# EAGLE board ab_v11_panel (EAGLE 6.1), part 1 of 2
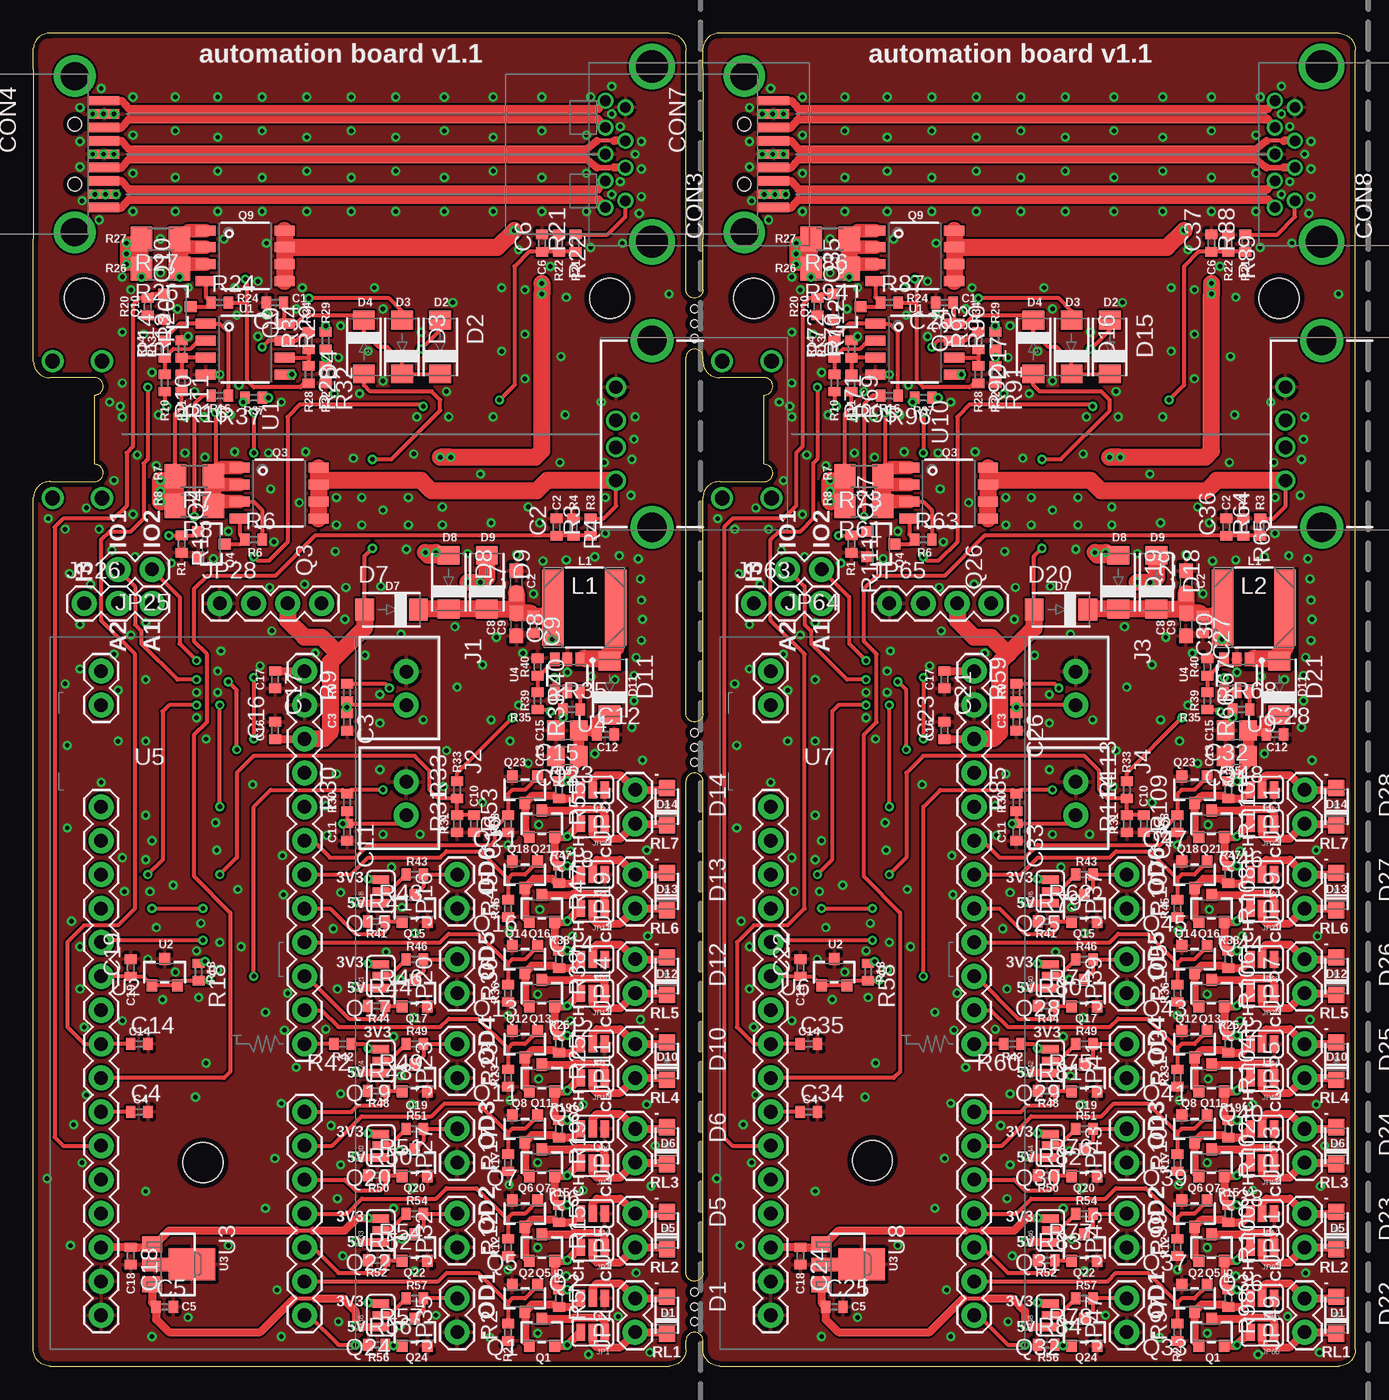
[diagram p0: board, top side]
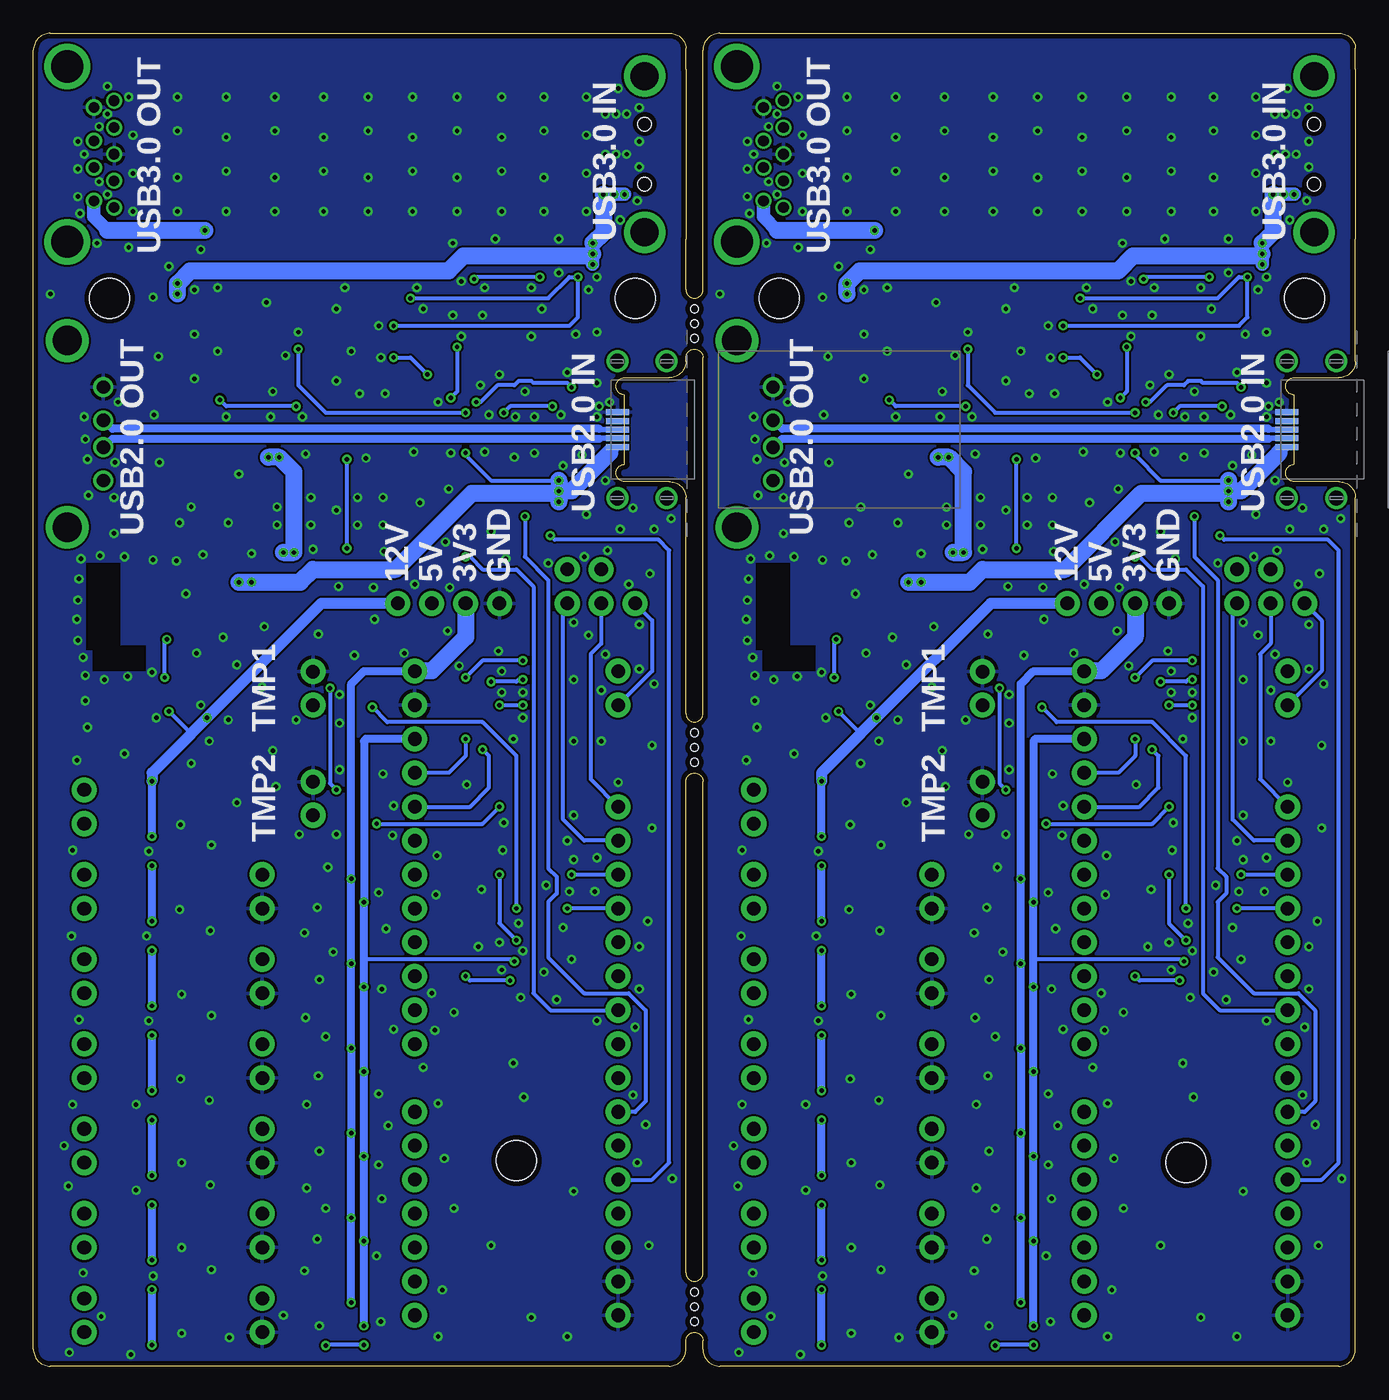
[diagram p1: board, bottom side, seen from below]

Size 99.06 x 99.86 mm. Coordinates in mm from the lower left corner, seen from the top.
Outline: 0,65.09 0,1.27 arc90 1.27,0 47.62,0 arc90 48.9,1.27 48.9,1.91 arc-180 50.16,1.91 50.16,1.27 arc90 51.44,0 97.79,0 arc90 99.06,1.27 99.06,98.58 arc90 97.79,99.85 51.44,99.85 arc90 50.16,98.74 50.16,97.16
Outline: 0,75.25 0,84.45
Outline: 0,97.16 0,98.74 arc-90 1.27,99.85 47.62,99.85 arc-90 48.9,98.58 48.9,80.64 arc180 50.16,80.64 50.16,84.45
Outline: 50.16,65.09 50.16,48.9 arc-180 48.9,48.9 48.9,75.56 arc-180 50.16,75.56 50.16,75.25
Outline: 48.9,6.99 48.9,43.81 arc-180 50.16,43.81 50.16,6.99 arc-180 48.9,6.99
Copper layers (1*16): Top 0.0356mm / dielectric 1.5011mm / Bottom 0.0356mm
Design rules: minimum track width 6mil, minimum drill 13mil, track to track 6mil, track to pad 6mil, pad to pad 6mil, via to via 6mil, smd to smd 6mil, copper to edge 15mil, drill to drill 6mil, minimum pad ring 7mil, minimum via ring 7mil, stop-mask expansion 4mil, vias tented up to drill 20mil, thermal gap 10mil
Holes 0.6 mm at 49.53,76.99 49.53,79.22 49.53,78.11 49.53,3.33 49.53,5.56 49.53,4.45 49.53,45.24 49.53,47.47 49.53,46.35
Holes 3 mm at 3.81,80.01 53.98,80.01 43.18,80.01 93.34,80.01 12.7,15.24 62.87,15.4
tRestrict: area 39.4,53.8 to 44.6,59.8; area 40.5,52.1 to 44.6,53.8; area 89.5,53.8 to 94.8,59.8; area 90.6,52.1 to 94.8,53.8
bRestrict: area 42.4,53.7 to 44.9,60.2; area 40.5,52.1 to 44.5,53.7; area 40.5,53.7 to 42.4,54; area 92.6,53.7 to 95.1,60.2; area 90.6,52.1 to 94.6,53.7; area 90.6,53.7 to 92.6,54

## Footprints (pad centres in the part's own frame; a part is rotated, then mirrored left to right if it is on the bottom)
C0402 = smd 0.7 x 0.9: 1 -0.65,0; 2 0.65,0
C0603 = smd 1.1 x 1: 1 -0.85,0; 2 0.85,0
C0805 = smd 1.3 x 1.5: 1 -0.85,0; 2 0.85,0
USB_A_C2345 = drill 1: 1-5V -3.5,2.71; 2-D- -1,2.71; 3-D+ 1,2.71; 4-GND 3.5,2.71 | drill 2.2: S1 -7,0; S2 7,0
MICRO_USB-B_C40949 = smd 0.45 x 1.72: 1-VCC -1.3,5.775; 2-D- -0.65,5.775; 3-D+ 0,5.775; 4-ID 0.65,5.775; 5-GND 1.3,5.775 | drill 1.1: S1 -5.125,5.775; S2 -5.125,2.075; S3 5.125,2.075; S4 5.125,5.775
USB3-F-C69073 = drill 0.8: 1-VBUS -3.5,2; 2-D- -1,2; 3-D+ 1,2; 4-GND 3.5,2; 5-SSRX- 4,3.5; 6-SSRX+ 2,3.5; 7-GND 0,3.5; 8-SSTX- -2,3.5; 9-SSTX+ -4,3.5 | drill 2.4: S1 -6.57,0; S2 6.57,0
USB3-M-C68740 = smd 0.7 x 2.3: 1-VBUS 3,2.76; 2-D- 1,2.76; 3-D+ -1,2.76; 4-GND -3,2.76; 5-SSRX- -4,2.76; 6-SSRX+ -2,2.76; 7-GNDD 0,2.76; 8-SSTX- 2,2.76; 9-SSTX+ 4,2.76 | drill 2.1: S1 -5.85,0.56; S2 5.85,0.56 | hole 1: -2.25,0.56; 2.25,0.56
SOD123W = smd 1.2 x 1.2: A -1.4,0; K 1.4,0
SMA = smd 1.4 x 1.64: A -2.015,0; K 2.015,0
B2B-XH-A = drill 1.016 pad 1.88: 1 -2.5,0; 2 0,0
SJ_3 = smd 0.635 x 1.27: 1 -0.889,0; 2 0,0; 3 0.889,0
1X02 = drill 1.016 pad 1.88: 1 0,0; 2 2.54,0
1X03 = drill 1.016 pad 1.88: 1 0,0; 2 2.54,0; 3 5.08,0
1X04 = drill 1.016 pad 1.88: 1 0,0; 2 2.54,0; 3 5.08,0; 4 7.62,0
INDUCTOR_6X6 = smd 1.6 x 5.7: 1 -2.35,0; 2 2.35,0
SOT23 = smd 0.8 x 0.9: 1 0.95,1; 2 -0.95,1; 3 0,-1
8-SOIC = smd 0.75 x 1.5: 1 -1.905,-2.95; 2 -0.635,-2.95; 3 0.635,-2.95; 4 1.905,-2.95; 5 1.905,2.95; 6 0.635,2.95; 7 -0.635,2.95; 8 -1.905,2.95
R0402 = smd 0.7 x 0.9: 1 -0.65,0; 2 0.65,0
R1206 = smd 1.6 x 1.803: 1 -1.422,0; 2 1.422,0
SOT-89 = smd 1.2 x 1.5: 1 -1.5,0; 3 1.5,0 | smd 1 x 2: 2 0,0.25 | smd 2.4 x 3.5: 2@1 0,3
SOT23-6 = smd 0.7 x 1: 1 -0.95,-1.2; 2 0,-1.2; 3 0.95,-1.2; 4 0.95,1.2; 5 0,1.2; 6 -0.95,1.2
STM32_BLUE_PILL_USABLE = drill 1.016 pad 1.88: 3V3 -7.62,-19.05; 3V3_2 7.62,24.13; 5V 7.62,19.05; A0 -7.62,13.97; A1 -7.62,11.43; A2 -7.62,8.89; A3 -7.62,6.35; A4 -7.62,3.81; A5 -7.62,1.27; A6 -7.62,-1.27; A7 -7.62,-3.81; A8 7.62,-13.97; A9 7.62,-11.43; A10 7.62,-8.89; A12 7.62,-3.81; A15 7.62,-1.27; B0 -7.62,-6.35; B1 -7.62,-8.89; B3 7.62,1.27; B4 7.62,3.81; B5 7.62,6.35; B6 7.62,8.89; B7 7.62,11.43; B8 7.62,13.97; B9 7.62,16.51; B10 -7.62,-11.43; B11 -7.62,-13.97; B12 7.62,-24.13; B13 7.62,-21.59; B14 7.62,-19.05; B15 7.62,-16.51; C13 -7.62,21.59; GND -7.62,-24.13; GND2 -7.62,-21.59; GND4 7.62,21.59; RST -7.62,-16.51; VBAT -7.62,24.13

## Placement (x,y rotation side)
C1  1u  [C0402]  18.1,79.69 180 top
C2  22n  [C0402]  39.21,62.87 90 top
C3  1u  [C0402]  23.5,48.26 270 top
C4  10n  [C0402]  7.94,19.05 0 top
C5  1u  [C0402]  9.84,4.45 0 top
C6  22n  [C0402]  38.1,84.14 90 top
C7  10u  [C0603]  36.2,58.74 90 top
C8  10u  [C0603]  36.2,55.56 270 top
C9  100n  [C0402]  37.47,55.56 270 top
C10  22n  [C0402]  33.02,40.64 270 top
C11  1u  [C0402]  23.5,40.01 270 top
C12  100n  [C0402]  42.86,47.31 0 top
C13  10u  [C0805]  40.01,45.72 180 top
C14  10n  [C0402]  7.94,24.13 0 top
C15  10u  [C0805]  40.01,47.62 180 top
C16  1u  [C0402]  18.1,47.62 90 top
C17  1u  [C0402]  18.1,51.44 270 top
C18  1u  [C0402]  7.3,8.26 270 top
C19  4.7u  [C0402]  7.3,29.84 90 top
C20  1u  [C0402]  68.26,79.69 180 top
C21  1u  [C0402]  68.26,51.44 270 top
C22  4.7u  [C0402]  57.47,29.84 90 top
C23  1u  [C0402]  68.26,47.62 90 top
C24  1u  [C0402]  57.47,8.26 270 top
C25  1u  [C0402]  60.01,4.45 0 top
C26  1u  [C0402]  73.66,48.26 270 top
C27  100n  [C0402]  87.63,55.56 270 top
C28  100n  [C0402]  93.03,47.31 0 top
C29  10u  [C0603]  86.36,58.74 90 top
C30  10u  [C0603]  86.36,55.56 270 top
C31  10u  [C0805]  90.17,45.72 180 top
C32  10u  [C0805]  90.17,47.62 180 top
C33  1u  [C0402]  73.66,40.01 270 top
C34  10n  [C0402]  58.1,19.05 0 top
C35  10n  [C0402]  58.1,24.13 0 top
C36  22n  [C0402]  89.38,62.87 90 top
C37  22n  [C0402]  88.27,84.14 90 top
C38  22n  [C0402]  83.19,40.64 270 top
CON1  USB-ABA-C2345  [USB_A_C2345]  46.35,69.85 90 top
CON2  USBC40949  [MICRO_USB-B_C40949]  -0.64,70.17 90 bottom
CON3  USB3F-C69073  [USB3-F-C69073]  46.35,90.81 90 top
CON4  USB3M-C68740  [USB3-M-C68740]  2.54,90.81 270 top
CON5  USBC40949  [MICRO_USB-B_C40949]  49.53,70.17 90 bottom
CON6  USB-ABA-C2345  [USB_A_C2345]  96.52,69.85 90 top
CON7  USB3M-C68740  [USB3-M-C68740]  52.7,90.81 270 top
CON8  USB3F-C69073  [USB3-F-C69073]  96.52,90.81 90 top
D1  B5817W  [SOD123W]  47.47,3.81 270 top
D2  SS14  [SMA]  30.48,76.36 270 top
D3  SS14  [SMA]  27.62,76.36 270 top
D4  SS14  [SMA]  24.77,76.36 90 top
D5  B5817W  [SOD123W]  47.47,10.16 270 top
D6  B5817W  [SOD123W]  47.47,16.51 270 top
D7  SS34  [SMA]  26.83,56.67 0 top
D8  SS34  [SMA]  31.11,58.74 270 top
D9  SS34  [SMA]  33.97,58.74 270 top
D10  B5817W  [SOD123W]  47.47,22.86 270 top
D11  SS34  [SMA]  43.18,50.8 270 top
D12  B5817W  [SOD123W]  47.47,29.21 270 top
D13  B5817W  [SOD123W]  47.47,35.56 270 top
D14  B5817W  [SOD123W]  47.47,41.91 270 top
D15  SS14  [SMA]  80.64,76.36 270 top
D16  SS14  [SMA]  77.79,76.36 270 top
D17  SS14  [SMA]  74.93,76.36 90 top
D18  SS34  [SMA]  84.14,58.74 270 top
D19  SS34  [SMA]  81.28,58.74 270 top
D20  SS34  [SMA]  76.99,56.67 0 top
D21  SS34  [SMA]  93.34,50.8 270 top
D22  B5817W  [SOD123W]  97.63,3.81 270 top
D23  B5817W  [SOD123W]  97.63,10.16 270 top
D24  B5817W  [SOD123W]  97.63,16.51 270 top
D25  B5817W  [SOD123W]  97.63,22.86 270 top
D26  B5817W  [SOD123W]  97.63,29.21 270 top
D27  B5817W  [SOD123W]  97.63,35.56 270 top
D28  B5817W  [SOD123W]  97.63,41.91 270 top
J1  M02XH  [B2B-XH-A]  27.94,49.53 270 top
J2  M02XH  [B2B-XH-A]  27.94,41.27 270 top
J3  M02XH  [B2B-XH-A]  78.11,49.53 270 top
J4  M02XH  [B2B-XH-A]  78.11,41.27 270 top
JP1  JUMPER-3SMD  [SJ_3]  41.91,2.54 180 top
JP2  [1X02]  45.09,2.54 90 top
JP3  JUMPER-3SMD  [SJ_3]  41.91,5.08 180 top
JP4  JUMPER-3SMD  [SJ_3]  41.91,8.89 180 top
JP5  [1X02]  45.09,8.89 90 top
JP6  JUMPER-3SMD  [SJ_3]  41.91,11.43 180 top
JP7  JUMPER-3SMD  [SJ_3]  41.91,15.24 180 top
JP8  [1X02]  45.09,15.24 90 top
JP9  JUMPER-3SMD  [SJ_3]  41.91,17.78 180 top
JP10  JUMPER-3SMD  [SJ_3]  41.91,21.59 180 top
JP11  [1X02]  45.09,21.59 90 top
JP12  JUMPER-3SMD  [SJ_3]  41.91,24.13 180 top
JP13  JUMPER-3SMD  [SJ_3]  41.91,27.94 180 top
JP14  [1X02]  45.09,27.94 90 top
JP15  JUMPER-3SMD  [SJ_3]  41.91,30.48 180 top
JP16  [1X02]  31.75,34.29 90 top
JP17  JUMPER-3SMD  [SJ_3]  41.91,34.29 180 top
JP18  JUMPER-3SMD  [SJ_3]  26.04,35.56 90 top
JP19  [1X02]  45.09,34.29 90 top
JP20  [1X02]  31.75,27.94 90 top
JP21  JUMPER-3SMD  [SJ_3]  26.04,29.21 90 top
JP22  JUMPER-3SMD  [SJ_3]  41.91,36.83 180 top
JP23  [1X02]  31.75,21.59 90 top
JP24  JUMPER-3SMD  [SJ_3]  26.04,22.86 90 top
JP25  [1X02]  8.89,59.69 180 top
JP26  [1X03]  3.81,57.15 0 top
JP27  [1X02]  31.75,15.24 90 top
JP28  [1X04]  13.97,57.15 0 top
JP29  JUMPER-3SMD  [SJ_3]  41.91,40.64 180 top
JP30  JUMPER-3SMD  [SJ_3]  26.04,16.51 90 top
JP31  [1X02]  45.09,40.64 90 top
JP32  [1X02]  31.75,8.89 90 top
JP33  JUMPER-3SMD  [SJ_3]  26.04,10.16 90 top
JP34  JUMPER-3SMD  [SJ_3]  41.91,43.18 180 top
JP35  [1X02]  31.75,2.54 90 top
JP36  JUMPER-3SMD  [SJ_3]  26.04,3.81 90 top
JP37  [1X02]  81.92,34.29 90 top
JP38  JUMPER-3SMD  [SJ_3]  76.2,35.56 90 top
JP39  [1X02]  81.92,27.94 90 top
JP40  JUMPER-3SMD  [SJ_3]  76.2,29.21 90 top
JP41  [1X02]  81.92,21.59 90 top
JP42  JUMPER-3SMD  [SJ_3]  76.2,22.86 90 top
JP43  [1X02]  81.92,15.24 90 top
JP44  JUMPER-3SMD  [SJ_3]  76.2,16.51 90 top
JP45  [1X02]  81.92,8.89 90 top
JP46  JUMPER-3SMD  [SJ_3]  76.2,10.16 90 top
JP47  [1X02]  81.92,2.54 90 top
JP48  JUMPER-3SMD  [SJ_3]  76.2,3.81 90 top
JP49  [1X02]  95.25,2.54 90 top
JP50  JUMPER-3SMD  [SJ_3]  92.08,5.08 180 top
JP51  [1X02]  95.25,8.89 90 top
JP52  JUMPER-3SMD  [SJ_3]  92.08,11.43 180 top
JP53  [1X02]  95.25,15.24 90 top
JP54  JUMPER-3SMD  [SJ_3]  92.08,17.78 180 top
JP55  [1X02]  95.25,21.59 90 top
JP56  JUMPER-3SMD  [SJ_3]  92.08,24.13 180 top
JP57  [1X02]  95.25,27.94 90 top
JP58  JUMPER-3SMD  [SJ_3]  92.08,30.48 180 top
JP59  [1X02]  95.25,34.29 90 top
JP60  JUMPER-3SMD  [SJ_3]  92.08,36.83 180 top
JP61  [1X02]  95.25,40.64 90 top
JP62  JUMPER-3SMD  [SJ_3]  92.08,43.18 180 top
JP63  [1X03]  53.98,57.15 0 top
JP64  [1X02]  59.05,59.69 180 top
JP65  [1X04]  64.14,57.15 0 top
JP66  JUMPER-3SMD  [SJ_3]  92.08,2.54 180 top
JP67  JUMPER-3SMD  [SJ_3]  92.08,8.89 180 top
JP68  JUMPER-3SMD  [SJ_3]  92.08,15.24 180 top
JP69  JUMPER-3SMD  [SJ_3]  92.08,21.59 180 top
JP70  JUMPER-3SMD  [SJ_3]  92.08,27.94 180 top
JP71  JUMPER-3SMD  [SJ_3]  92.08,34.29 180 top
JP72  JUMPER-3SMD  [SJ_3]  92.08,40.64 180 top
L1  4.7u  [INDUCTOR_6X6]  41.27,56.83 0 top
L2  4.7u  [INDUCTOR_6X6]  91.44,56.83 0 top
Q1  AO3401A  [SOT23]  38.1,2.54 180 top
Q2  AO3400A  [SOT23]  36.83,5.08 0 top
Q3  AO4407A  [8-SOIC]  18.41,65.41 270 top
Q4  2N7002  [SOT23]  13.34,61.59 90 top
Q5  AO3401A  [SOT23]  38.1,8.89 180 top
Q6  AO3400A  [SOT23]  36.83,11.43 0 top
Q7  AO3401A  [SOT23]  38.1,15.24 180 top
Q8  AO3400A  [SOT23]  36.83,17.78 0 top
Q9  AO4407A  [8-SOIC]  15.88,83.19 270 top
Q10  2N7002  [SOT23]  10.79,79.38 90 top
Q11  AO3401A  [SOT23]  38.1,21.59 180 top
Q12  AO3400A  [SOT23]  36.83,24.13 0 top
Q13  AO3401A  [SOT23]  38.1,27.94 180 top
Q14  AO3400A  [SOT23]  36.83,30.48 0 top
Q15  2N7002  [SOT23]  28.57,34.29 180 top
Q16  AO3401A  [SOT23]  38.1,34.29 180 top
Q17  2N7002  [SOT23]  28.57,27.94 180 top
Q18  AO3400A  [SOT23]  36.83,36.83 0 top
Q19  2N7002  [SOT23]  28.57,21.59 180 top
Q20  2N7002  [SOT23]  28.57,15.24 180 top
Q21  AO3401A  [SOT23]  38.1,40.64 180 top
Q22  2N7002  [SOT23]  28.57,8.89 180 top
Q23  AO3400A  [SOT23]  36.83,43.18 0 top
Q24  2N7002  [SOT23]  28.57,2.54 180 top
Q25  2N7002  [SOT23]  78.74,34.29 180 top
Q26  AO4407A  [8-SOIC]  68.58,65.41 270 top
Q27  2N7002  [SOT23]  63.5,61.59 90 top
Q28  2N7002  [SOT23]  78.74,27.94 180 top
Q29  2N7002  [SOT23]  78.74,21.59 180 top
Q30  2N7002  [SOT23]  78.74,15.24 180 top
Q31  2N7002  [SOT23]  78.74,8.89 180 top
Q32  2N7002  [SOT23]  78.74,2.54 180 top
Q33  AO3401A  [SOT23]  88.27,2.54 180 top
Q34  AO4407A  [8-SOIC]  66.04,83.19 270 top
Q35  2N7002  [SOT23]  60.96,79.38 90 top
Q36  AO3400A  [SOT23]  87,5.08 0 top
Q37  AO3401A  [SOT23]  88.27,8.89 180 top
Q38  AO3400A  [SOT23]  87,11.43 0 top
Q39  AO3401A  [SOT23]  88.27,15.24 180 top
Q40  AO3400A  [SOT23]  87,17.78 0 top
Q41  AO3401A  [SOT23]  88.27,21.59 180 top
Q42  AO3400A  [SOT23]  87,24.13 0 top
Q43  AO3401A  [SOT23]  88.27,27.94 180 top
Q44  AO3400A  [SOT23]  87,30.48 0 top
Q45  AO3401A  [SOT23]  88.27,34.29 180 top
Q46  AO3400A  [SOT23]  87,36.83 0 top
Q47  AO3401A  [SOT23]  88.27,40.64 180 top
Q48  AO3400A  [SOT23]  87,43.18 0 top
R1  10k  [R0402]  11.11,61.59 270 top
R2  10k  [R0402]  35.56,2.54 90 top
R3  8.1k  [R0402]  41.75,62.87 90 top
R4  10k  [R0402]  40.48,62.87 270 top
R5  10k  [R0402]  39.37,5.08 270 top
R6  10k  [R0402]  16.51,61.91 0 top
R7  100m  [R1206]  12.06,66.67 180 top
R8  100m  [R1206]  12.06,64.45 180 top
R9  10k  [R0402]  23.5,50.48 90 top
R10  1k  [R0402]  9.84,73.66 270 top
R11  1k  [R0402]  11.11,73.66 270 top
R12  10k  [R0402]  35.56,8.89 90 top
R13  20k  [R0402]  11.11,76.2 90 top
R14  20k  [R0402]  9.84,76.2 90 top
R15  10k  [R0402]  39.37,11.43 270 top
R16  10k  [R0402]  13.97,72.71 180 top
R17  10k  [R0402]  35.56,15.24 90 top
R18  120  [R0402]  12.38,29.53 270 top
R19  10k  [R0402]  39.37,17.78 270 top
R20  10k  [R0402]  8.57,79.38 270 top
R21  8.1k  [R0402]  40.64,84.14 90 top
R22  10k  [R0402]  39.37,84.14 270 top
R23  10k  [R0402]  35.56,21.59 90 top
R24  10k  [R0402]  13.97,79.69 0 top
R25  10k  [R0402]  39.37,24.13 270 top
R26  100m  [R1206]  9.53,82.23 180 top
R27  100m  [R1206]  9.53,84.45 180 top
R28  1k  [R0402]  20.64,74.3 270 top
R29  1k  [R0402]  21.91,76.83 90 top
R30  10k  [R0402]  23.5,42.23 90 top
R31  10k  [R0402]  31.75,40.64 90 top
R32  20k  [R0402]  21.91,74.3 270 top
R33  33k  [R0402]  31.75,43.18 90 top
R34  20k  [R0402]  20.64,76.83 90 top
R35  20k  [R0402]  40.32,49.21 0 top
R36  10k  [R0402]  35.56,27.94 90 top
R37  10k  [R0402]  16.51,72.55 180 top
R38  10k  [R0402]  39.37,30.48 270 top
R39  51k  [R0402]  37.78,49.85 270 top
R40  2.7k  [R0402]  37.78,52.39 270 top
R41  10k  [R0402]  25.72,33.34 0 top
R42  1.8k  [R0402]  23.18,24.13 180 top
R43  1k  [R0402]  28.57,36.83 180 top
R44  10k  [R0402]  25.72,26.99 0 top
R45  10k  [R0402]  35.56,34.29 90 top
R46  1k  [R0402]  28.57,30.48 180 top
R47  10k  [R0402]  39.37,36.83 270 top
R48  10k  [R0402]  25.72,20.64 0 top
R49  1k  [R0402]  28.57,24.13 180 top
R50  10k  [R0402]  25.72,14.29 0 top
R51  1k  [R0402]  28.57,17.78 180 top
R52  10k  [R0402]  25.72,7.94 0 top
R53  10k  [R0402]  35.56,40.64 90 top
R54  1k  [R0402]  28.57,11.43 180 top
R55  10k  [R0402]  39.37,43.18 270 top
R56  10k  [R0402]  25.72,1.59 0 top
R57  1k  [R0402]  28.57,5.08 180 top
R58  120  [R0402]  62.55,29.53 270 top
R59  10k  [R0402]  73.66,50.48 90 top
R60  1.8k  [R0402]  73.34,24.13 180 top
R61  100m  [R1206]  62.23,64.45 180 top
R62  1k  [R0402]  78.74,36.83 180 top
R63  10k  [R0402]  66.67,61.91 0 top
R64  8.1k  [R0402]  91.92,62.87 90 top
R65  10k  [R0402]  90.65,62.87 270 top
R66  51k  [R0402]  87.95,49.85 270 top
R67  2.7k  [R0402]  87.95,52.39 270 top
R68  20k  [R0402]  90.49,49.21 0 top
R69  1k  [R0402]  61.28,73.66 270 top
R70  20k  [R0402]  61.28,76.2 90 top
R71  1k  [R0402]  60.01,73.66 270 top
R72  20k  [R0402]  60.01,76.2 90 top
R73  100m  [R1206]  62.23,66.67 180 top
R74  1k  [R0402]  78.74,30.48 180 top
R75  1k  [R0402]  78.74,24.13 180 top
R76  1k  [R0402]  78.74,17.78 180 top
R77  1k  [R0402]  78.74,11.43 180 top
R78  1k  [R0402]  78.74,5.08 180 top
R79  10k  [R0402]  75.88,33.34 0 top
R80  10k  [R0402]  75.88,26.99 0 top
R81  10k  [R0402]  75.88,20.64 0 top
R82  10k  [R0402]  75.88,14.29 0 top
R83  10k  [R0402]  75.88,7.94 0 top
R84  10k  [R0402]  75.88,1.59 0 top
R85  10k  [R0402]  73.66,42.23 90 top
R86  100m  [R1206]  59.69,84.45 180 top
R87  10k  [R0402]  64.14,79.69 0 top
R88  8.1k  [R0402]  90.81,84.14 90 top
R89  10k  [R0402]  89.53,84.14 270 top
R90  1k  [R0402]  72.07,76.83 90 top
R91  20k  [R0402]  72.07,74.3 270 top
R92  1k  [R0402]  70.8,74.3 270 top
R93  20k  [R0402]  70.8,76.83 90 top
R94  100m  [R1206]  59.69,82.23 180 top
R95  10k  [R0402]  64.14,72.71 180 top
R96  10k  [R0402]  66.67,72.55 180 top
R97  10k  [R0402]  85.72,2.54 90 top
R98  10k  [R0402]  89.53,5.08 270 top
R99  10k  [R0402]  85.72,8.89 90 top
R100  10k  [R0402]  89.53,11.43 270 top
R101  10k  [R0402]  85.72,15.24 90 top
R102  10k  [R0402]  89.53,17.78 270 top
R103  10k  [R0402]  85.72,21.59 90 top
R104  10k  [R0402]  89.53,24.13 270 top
R105  10k  [R0402]  85.72,27.94 90 top
R106  10k  [R0402]  89.53,30.48 270 top
R107  10k  [R0402]  85.72,34.29 90 top
R108  10k  [R0402]  89.53,36.83 270 top
R109  10k  [R0402]  85.72,40.64 90 top
R110  10k  [R0402]  89.53,43.18 270 top
R111  10k  [R0402]  61.28,61.59 270 top
R112  10k  [R0402]  58.74,79.38 270 top
R113  33k  [R0402]  81.92,43.18 90 top
R114  10k  [R0402]  81.92,40.64 90 top
U1  MCP6002SOIC  [8-SOIC]  15.88,76.2 270 top
U2  CJ431  [SOT23]  9.84,29.53 180 top
U3  3.3V  [SOT-89]  8.89,7.62 270 top
U4  FP6291  [SOT23-6]  40.01,51.75 180 top
U5  STM32_BLUE_PILL  [STM32_BLUE_PILL_USABLE]  12.7,27.94 0 top
U6  CJ431  [SOT23]  60.01,29.53 180 top
U7  STM32_BLUE_PILL  [STM32_BLUE_PILL_USABLE]  62.87,27.94 0 top
U8  3.3V  [SOT-89]  59.05,7.62 270 top
U9  FP6291  [SOT23-6]  90.17,51.75 180 top
U10  MCP6002SOIC  [8-SOIC]  66.04,76.2 270 top

## Library data of the parts
C1-C38 R1-R114 = resistor
CON1-CON8 D1-D28 J1-J4 L1 L2 Q1-Q48 U1-U10 = custom
JP1-JP72 = SparkFun

## Nets
2V1: C22.1 R58.2 R59.2 R85.2 U6.1 U6.2 U7.A5
2V495: C19.1 R9.2 R18.2 R30.2 U2.1 U2.2 U5.A5
3V1: C21.1 C24.1 JP38.3 JP40.3 JP42.3 JP44.3 JP46.3 JP48.3 JP65.2 R60.1 U7.3V3 U7.3V3_2 U8.1
3V3: C17.1 C18.1 JP18.3 JP21.3 JP24.3 JP28.2 JP30.3 JP33.3 JP36.3 R42.1 U3.1 U5.3V3 U5.3V3_2
12V: C12.1 C13.1 C15.1 D11.K JP1.3 JP4.3 JP7.3 JP10.3 JP13.3 JP17.3 JP28.4 JP29.3 Q1.2 Q5.2 Q7.2 Q11.2 Q13.2 Q16.2 Q21.2 R5.1 R15.1 R19.1 R25.1 R33.2 R38.1 R39.2 R47.1 R55.1
12V1: C28.1 C31.1 C32.1 D21.K JP65.4 JP66.3 JP67.3 JP68.3 JP69.3 JP70.3 JP71.3 JP72.3 Q33.2 Q37.2 Q39.2 Q41.2 Q43.2 Q45.2 Q47.2 R66.2 R98.1 R100.1 R102.1 R104.1 R106.1 R108.1 R110.1 R113.2
12VSNS: C10.1 R31.2 R33.1 U5.A4
12VSNS1: C38.1 R113.1 R114.2 U7.A4
AUXADC1: JP26.3 U5.A1
AUXADC2: JP26.2 U5.A0
AUXADC3: JP63.3 U7.A1
AUXADC4: JP63.2 U7.A0
AUXI1: JP63.1 U7.C13
AUXI3: JP26.1 U5.C13
AUXIO1: JP25.2 U5.B8
AUXIO2: JP25.1 U5.B9
AUXIO3: JP64.1 U7.B9
AUXIO4: JP64.2 U7.B8
BOOSTVCC: C7.1 C8.1 C9.1 D7.K D8.K D9.K L1.1 U4.4 U4.5
BOOSTVCC1: C27.1 C29.1 C30.1 D18.K D19.K D20.K L2.1 U9.4 U9.5
D+2P0: CON1.3-D+ CON2.3-D+
D+2P1: CON5.3-D+ CON6.3-D+
D+3P0: CON3.3-D+ CON4.3-D+
D+3P1: CON7.3-D+ CON8.3-D+
D-2P0: CON1.2-D- CON2.2-D-
D-2P1: CON5.2-D- CON6.2-D-
D-3P0: CON3.2-D- CON4.2-D-
D-3P1: CON7.2-D- CON8.2-D-
FB: R39.1 R40.2 U4.3
FB1: R66.1 R67.2 U9.3
GND: C1.2 C2.2 C3.2 C4.2 C5.2 C6.2 C7.2 C8.2 C9.2 C10.2 C11.2 C12.2 C13.2 C14.2 C15.2 C16.2 C17.2 C18.2 C19.2 CON1.4-GND CON2.5-GND CON3.4-GND CON3.7-GND CON4.4-GND CON4.7-GNDD J1.1 J2.1 JP3.1 JP6.1 JP9.1 JP12.1 JP15.1 JP16.1 JP20.1 JP22.1 JP23.1 JP27.1 JP28.1 JP32.1 JP34.1 JP35.1 Q2.2 Q4.2 Q6.2 Q8.2 Q10.2 Q12.2 Q14.2 Q15.2 Q17.2 Q18.2 Q19.2 Q20.2 Q22.2 Q23.2 Q24.2 R1.2 R2.1 R4.1 R12.1 R13.2 R17.1 R20.2 R22.1 R23.1 R31.1 R32.2 R35.1 R36.1 R40.1 R41.1 R44.1 R45.1 R48.1 R50.1 R52.1 R53.1 R56.1 U1.4 U2.3 U3.2 U3.2@1 U4.2 U5.GND U5.GND2 U5.GND4
GND1: C20.2 C21.2 C22.2 C23.2 C24.2 C25.2 C26.2 C27.2 C28.2 C29.2 C30.2 C31.2 C32.2 C33.2 C34.2 C35.2 C36.2 C37.2 C38.2 CON5.5-GND CON6.4-GND CON7.4-GND CON7.7-GNDD CON8.4-GND CON8.7-GND J3.1 J4.1 JP37.1 JP39.1 JP41.1 JP43.1 JP45.1 JP47.1 JP50.1 JP52.1 JP54.1 JP56.1 JP58.1 JP60.1 JP62.1 JP65.1 Q25.2 Q27.2 Q28.2 Q29.2 Q30.2 Q31.2 Q32.2 Q35.2 Q36.2 Q38.2 Q40.2 Q42.2 Q44.2 Q46.2 Q48.2 R65.1 R67.1 R68.1 R70.2 R79.1 R80.1 R81.1 R82.1 R83.1 R84.1 R89.1 R91.2 R97.1 R99.1 R101.1 R103.1 R105.1 R107.1 R109.1 R111.2 R112.2 R114.1 U6.3 U7.GND U7.GND2 U7.GND4 U8.2 U8.2@1 U9.2 U10.4
N$1: JP16.2 Q15.3 R43.1
N$2: Q9.4 Q10.3 R24.1
N$3: R10.1 R14.1 U1.2
N$4: R11.1 R13.1 U1.3
N$5: JP21.2 R46.2
N$6: JP18.2 R43.2
N$7: Q3.4 Q4.3 R6.1
N$8: JP20.2 Q17.3 R46.1
N$9: JP24.2 R49.2
N$10: JP23.2 Q19.3 R49.1
N$11: JP30.2 R51.2
N$12: JP27.2 Q20.3 R51.1
N$13: JP33.2 R54.2
N$14: JP32.2 Q22.3 R54.1
N$15: JP36.2 R57.2
N$16: R28.1 R34.1 U1.6
N$17: R29.1 R32.1 U1.5
N$18: JP35.2 Q24.3 R57.1
N$19: R60.2 U7.A12
N$20: JP6.3 Q5.1 Q6.3 R15.2
N$21: JP38.2 R62.2
N$22: Q26.4 Q27.3 R63.1
N$23: R71.1 R72.1 U10.2
N$24: R69.1 R70.1 U10.3
N$25: JP37.2 Q25.3 R62.1
N$26: R42.2 U5.A12
N$27: JP40.2 R74.2
N$28: JP39.2 Q28.3 R74.1
N$29: JP42.2 R75.2
N$30: JP41.2 Q29.3 R75.1
N$31: JP44.2 R76.2
N$32: JP43.2 Q30.3 R76.1
N$33: JP46.2 R77.2
N$34: JP45.2 Q31.3 R77.1
N$35: JP48.2 R78.2
N$36: JP47.2 Q32.3 R78.1
N$37: Q34.4 Q35.3 R87.1
N$38: R92.1 R93.1 U10.6
N$39: R90.1 R91.1 U10.5
N$40: JP52.3 Q37.1 Q38.3 R100.2
OC: R35.2 U4.6
OC1: R68.2 U9.6
OD_1: Q24.1 R56.2 U5.B12
OD_2: Q22.1 R52.2 U5.B14
OD_3: Q20.1 R50.2 U5.A8
OD_4: Q19.1 R48.2 U5.A10
OD_5: Q17.1 R44.2 U5.B3
OD_6: Q15.1 R41.2 U5.B5
OD_7: Q32.1 R84.2 U7.B12
OD_8: Q31.1 R83.2 U7.B14
OD_9: Q30.1 R82.2 U7.A8
OD_10: Q29.1 R81.2 U7.A10
OD_11: Q28.1 R80.2 U7.B3
OD_12: Q25.1 R79.2 U7.B5
RLY1-SW: D1.K JP1.2 JP2.1
RLY1-SW1: D5.K JP4.2 JP5.1
RLY1-SW2: D6.K JP7.2 JP8.1
RLY1-SW3: D10.K JP10.2 JP11.1
RLY1-SW4: D12.K JP13.2 JP14.1
RLY1-SW5: D13.K JP17.2 JP19.1
RLY1-SW6: D14.K JP29.2 JP31.1
RLY1-SW7: D22.K JP49.1 JP66.2
RLY1-SW8: D23.K JP51.1 JP67.2
RLY1-SW9: D24.K JP53.1 JP68.2
RLY1-SW10: D25.K JP55.1 JP69.2
RLY1-SW11: D26.K JP57.1 JP70.2
RLY1-SW12: D27.K JP59.1 JP71.2
RLY1-SW13: D28.K JP61.1 JP72.2
RLY1D: JP1.1 Q1.3
RLY1D1: JP4.1 Q5.3
RLY1D2: JP7.1 Q7.3
RLY1D3: JP10.1 Q11.3
RLY1D4: JP13.1 Q13.3
RLY1D5: JP17.1 Q16.3
RLY1D6: JP29.1 Q21.3
RLY1D7: JP66.1 Q33.3
RLY1D8: JP67.1 Q37.3
RLY1D9: JP68.1 Q39.3
RLY1D10: JP69.1 Q41.3
RLY1D11: JP70.1 Q43.3
RLY1D12: JP71.1 Q45.3
RLY1D13: JP72.1 Q47.3
RLY1DG: JP3.3 Q1.1 Q2.3 R5.2
RLY1DG1: JP50.3 Q33.1 Q36.3 R98.2
RLY1DG2: JP9.3 Q7.1 Q8.3 R19.2
RLY1DG3: JP12.3 Q11.1 Q12.3 R25.2
RLY1DG4: JP15.3 Q13.1 Q14.3 R38.2
RLY1DG5: JP22.3 Q16.1 Q18.3 R47.2
RLY1DG6: JP34.3 Q21.1 Q23.3 R55.2
RLY1DG7: JP54.3 Q39.1 Q40.3 R102.2
RLY1DG8: JP56.3 Q41.1 Q42.3 R104.2
RLY1DG9: JP58.3 Q43.1 Q44.3 R106.2
RLY1DG10: JP60.3 Q45.1 Q46.3 R108.2
RLY1DG11: JP62.3 Q47.1 Q48.3 R110.2
RLY1SPLY: D1.A JP2.2 JP3.2
RLY1SPLY1: D5.A JP5.2 JP6.2
RLY1SPLY2: D6.A JP8.2 JP9.2
RLY1SPLY3: D10.A JP11.2 JP12.2
RLY1SPLY4: D12.A JP14.2 JP15.2
RLY1SPLY5: D13.A JP19.2 JP22.2
RLY1SPLY6: D14.A JP31.2 JP34.2
RLY1SPLY7: D22.A JP49.2 JP50.2
RLY1SPLY8: D23.A JP51.2 JP52.2
RLY1SPLY9: D24.A JP53.2 JP54.2
RLY1SPLY10: D25.A JP55.2 JP56.2
RLY1SPLY11: D26.A JP57.2 JP58.2
RLY1SPLY12: D27.A JP59.2 JP60.2
RLY1SPLY13: D28.A JP61.2 JP62.2
RLY_1: Q2.1 R2.2 U5.B13
RLY_2: Q6.1 R12.2 U5.B15
RLY_3: Q8.1 R17.2 U5.A9
RLY_4: Q12.1 R23.2 U5.A15
RLY_5: Q14.1 R36.2 U5.B4
RLY_6: Q18.1 R45.2 U5.B6
RLY_7: Q23.1 R53.2 U5.B7
RLY_8: Q36.1 R97.2 U7.B13
RLY_9: Q38.1 R99.2 U7.B15
RLY_10: Q40.1 R101.2 U7.A9
RLY_11: Q42.1 R103.2 U7.A15
RLY_12: Q44.1 R105.2 U7.B4
RLY_13: Q46.1 R107.2 U7.B6
RLY_14: Q48.1 R109.2 U7.B7
SSRX+: CON3.6-SSRX+ CON4.6-SSRX+
SSRX+1: CON7.6-SSRX+ CON8.6-SSRX+
SSRX-: CON3.5-SSRX- CON4.5-SSRX-
SSRX-1: CON7.5-SSRX- CON8.5-SSRX-
SSTX+: CON3.9-SSTX+ CON4.9-SSTX+
SSTX+1: CON7.9-SSTX+ CON8.9-SSTX+
SSTX-: CON3.8-SSTX- CON4.8-SSTX-
SSTX-1: CON7.8-SSTX- CON8.8-SSTX-
SW: D11.A L1.2 U4.1
SW1: D21.A L2.2 U9.1
USB2-EN: Q4.1 R1.1 U5.B11
USB2-EN1: Q27.1 R111.1 U7.B11
USB2-ISNS: C4.1 R16.2 U5.B1
USB2-ISNS1: C34.1 R95.2 U7.B1
USB2-ISNS-R: R14.2 R16.1 U1.1
USB2-ISNS-R1: R72.2 R95.1 U10.1
USB2-TSNS: C3.1 J1.2 R9.1 U5.A3
USB2-TSNS1: C26.1 J3.2 R59.1 U7.A3
USB2-VCC-SW: CON1.1-5V Q3.5 Q3.6 Q3.7 Q3.8 R3.2
USB2-VCC-SW1: CON6.1-5V Q26.5 Q26.6 Q26.7 Q26.8 R64.2
USB2-VSNS: C2.1 R3.1 R4.2 U5.B0
USB2-VSNS1: C36.1 R64.1 R65.2 U7.B0
USB2VIN: CON2.1-VCC D2.A D9.A R7.2 R8.2 R11.2
USB2VIN1: CON5.1-VCC D15.A D18.A R61.2 R69.2 R73.2
USB3-EN: Q10.1 R20.1 U5.B10
USB3-EN1: Q35.1 R112.1 U7.B10
USB3-ISNS: C14.1 R37.2 U5.A7
USB3-ISNS1: C35.1 R96.2 U7.A7
USB3-ISNS-R: R34.2 R37.1 U1.7
USB3-ISNS-R1: R93.2 R96.1 U10.7
USB3-TSNS: C11.1 J2.2 R30.1 U5.A2
USB3-TSNS1: C33.1 J4.2 R85.1 U7.A2
USB3-VCC-SW: CON3.1-VBUS Q9.5 Q9.6 Q9.7 Q9.8 R21.2
USB3-VCC-SW1: CON8.1-VBUS Q34.5 Q34.6 Q34.7 Q34.8 R88.2
USB3-VSNS: C6.1 R21.1 R22.2 U5.A6
USB3-VSNS1: C37.1 R88.1 R89.2 U7.A6
USB3OUTVCC: Q9.1 Q9.2 Q9.3 R24.2 R26.1 R27.1 R28.2
USB3OUTVCC1: Q34.1 Q34.2 Q34.3 R86.1 R87.2 R92.2 R94.1
USB3VIN: CON4.1-VBUS D3.A D8.A R26.2 R27.2 R29.2
USB3VIN1: CON7.1-VBUS D16.A D19.A R86.2 R90.2 R94.2
USBBPIN: C5.1 C16.1 D4.A D7.A JP18.1 JP21.1 JP24.1 JP28.3 JP30.1 JP33.1 JP36.1 R18.1 U3.3 U5.5V
USBBPIN1: C23.1 C25.1 D17.A D20.A JP38.1 JP40.1 JP42.1 JP44.1 JP46.1 JP48.1 JP65.3 R58.1 U7.5V U8.3
USBOUTVCC: Q3.1 Q3.2 Q3.3 R6.2 R7.1 R8.1 R10.2
USBOUTVCC1: Q26.1 Q26.2 Q26.3 R61.1 R63.2 R71.2 R73.1
VUSBMAX: C1.1 D2.K D3.K D4.K U1.8
VUSBMAX1: C20.1 D15.K D16.K D17.K U10.8